# EAGLE board magnetorquer_board_f1 (EAGLE 9.0.0)
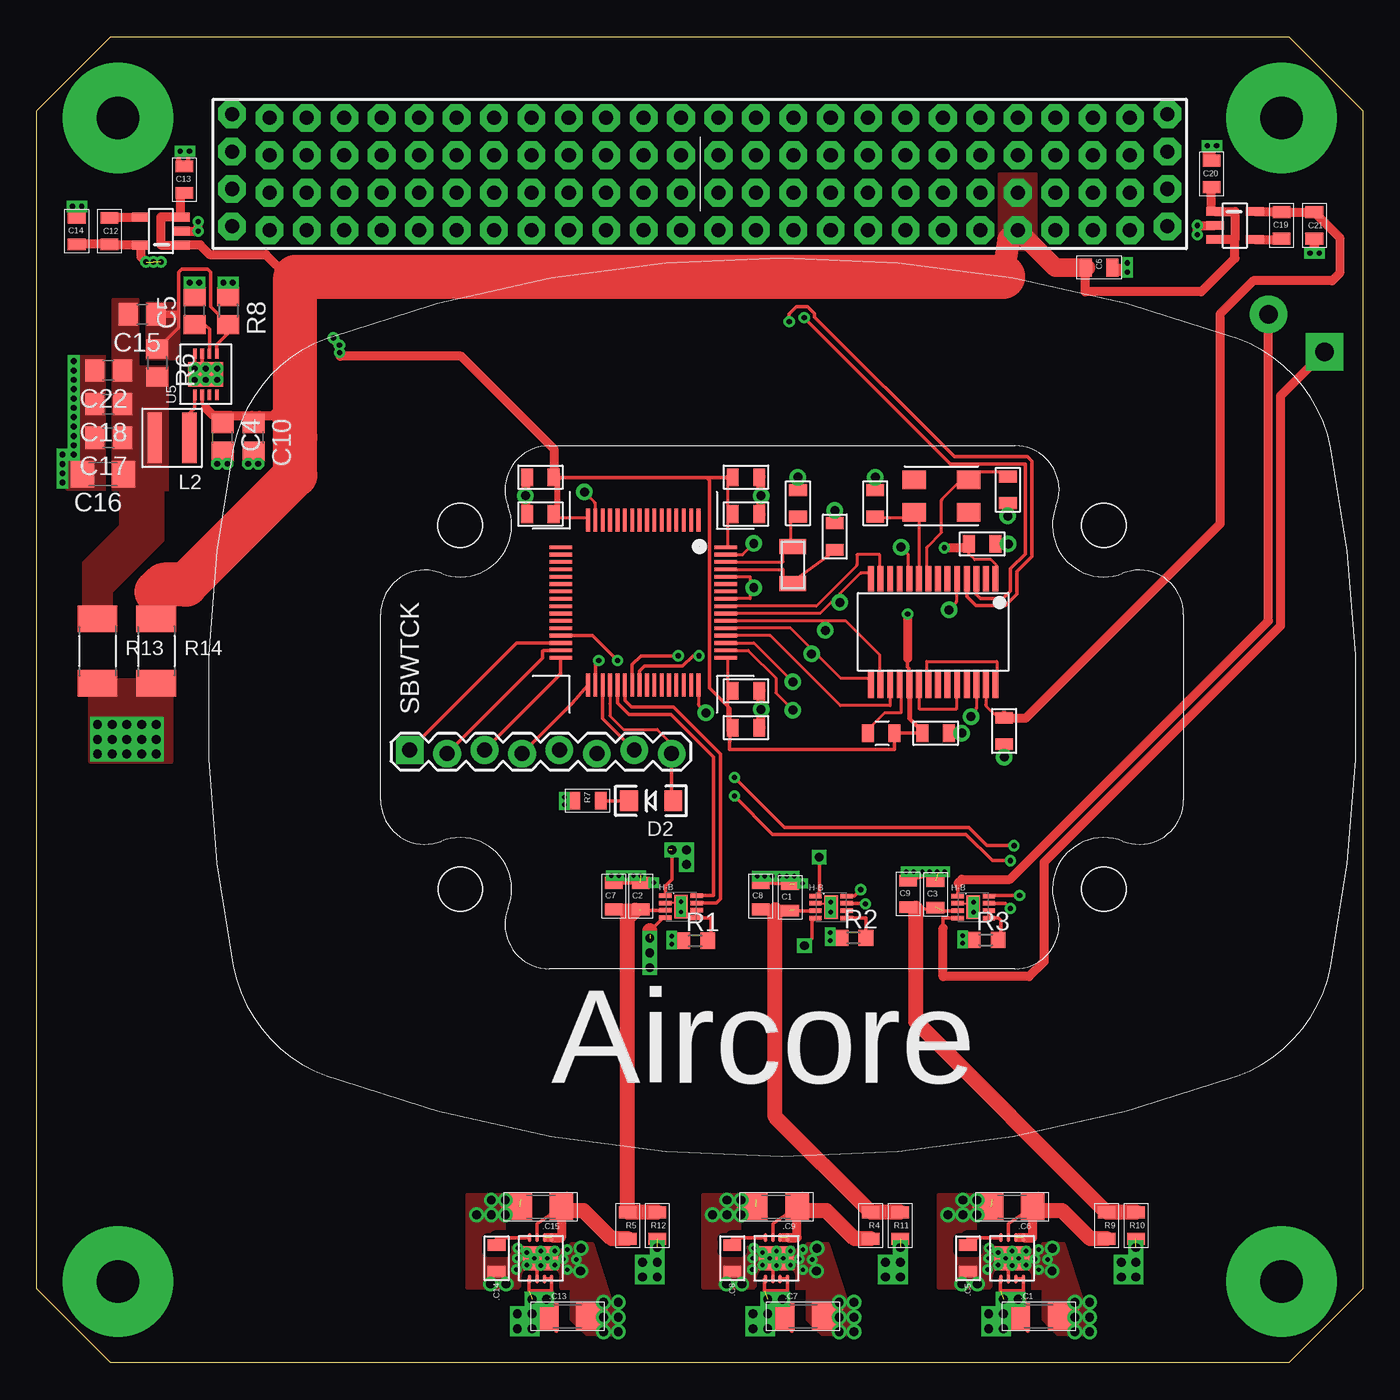
[diagram p0: board, top side]
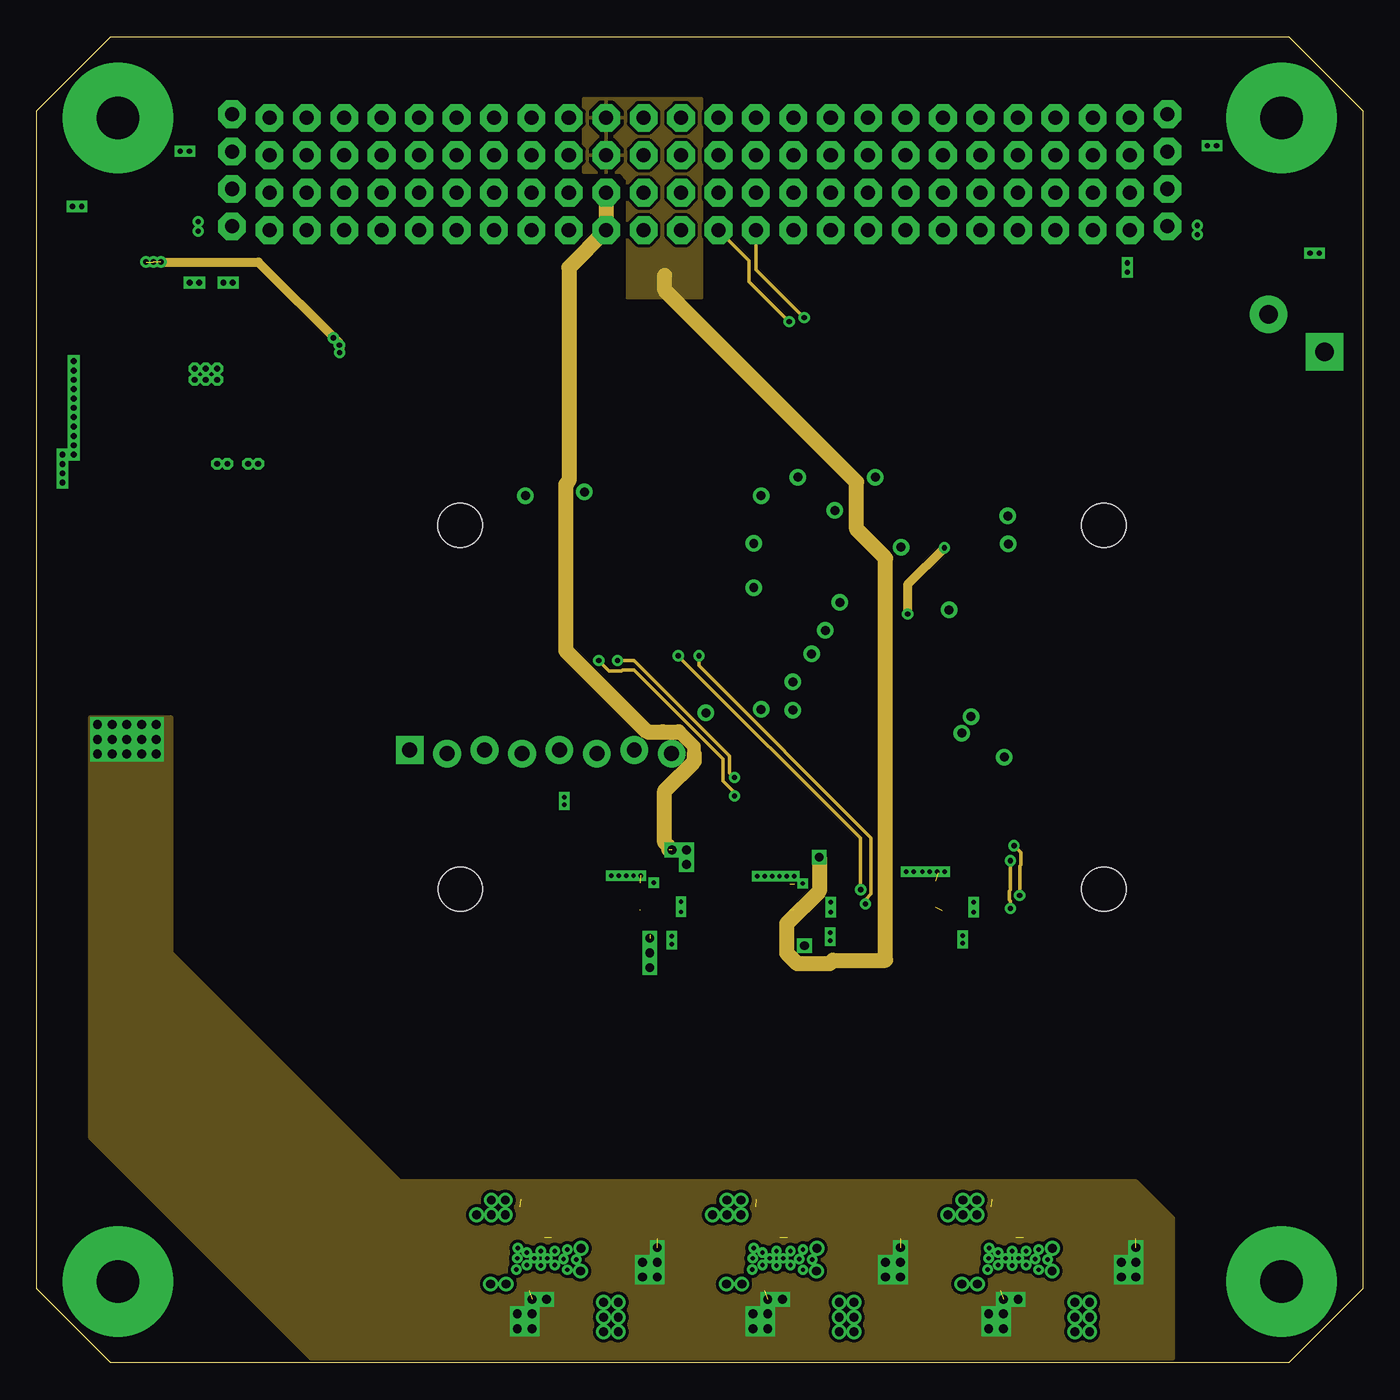
[diagram p1: board, inner layer Route2]
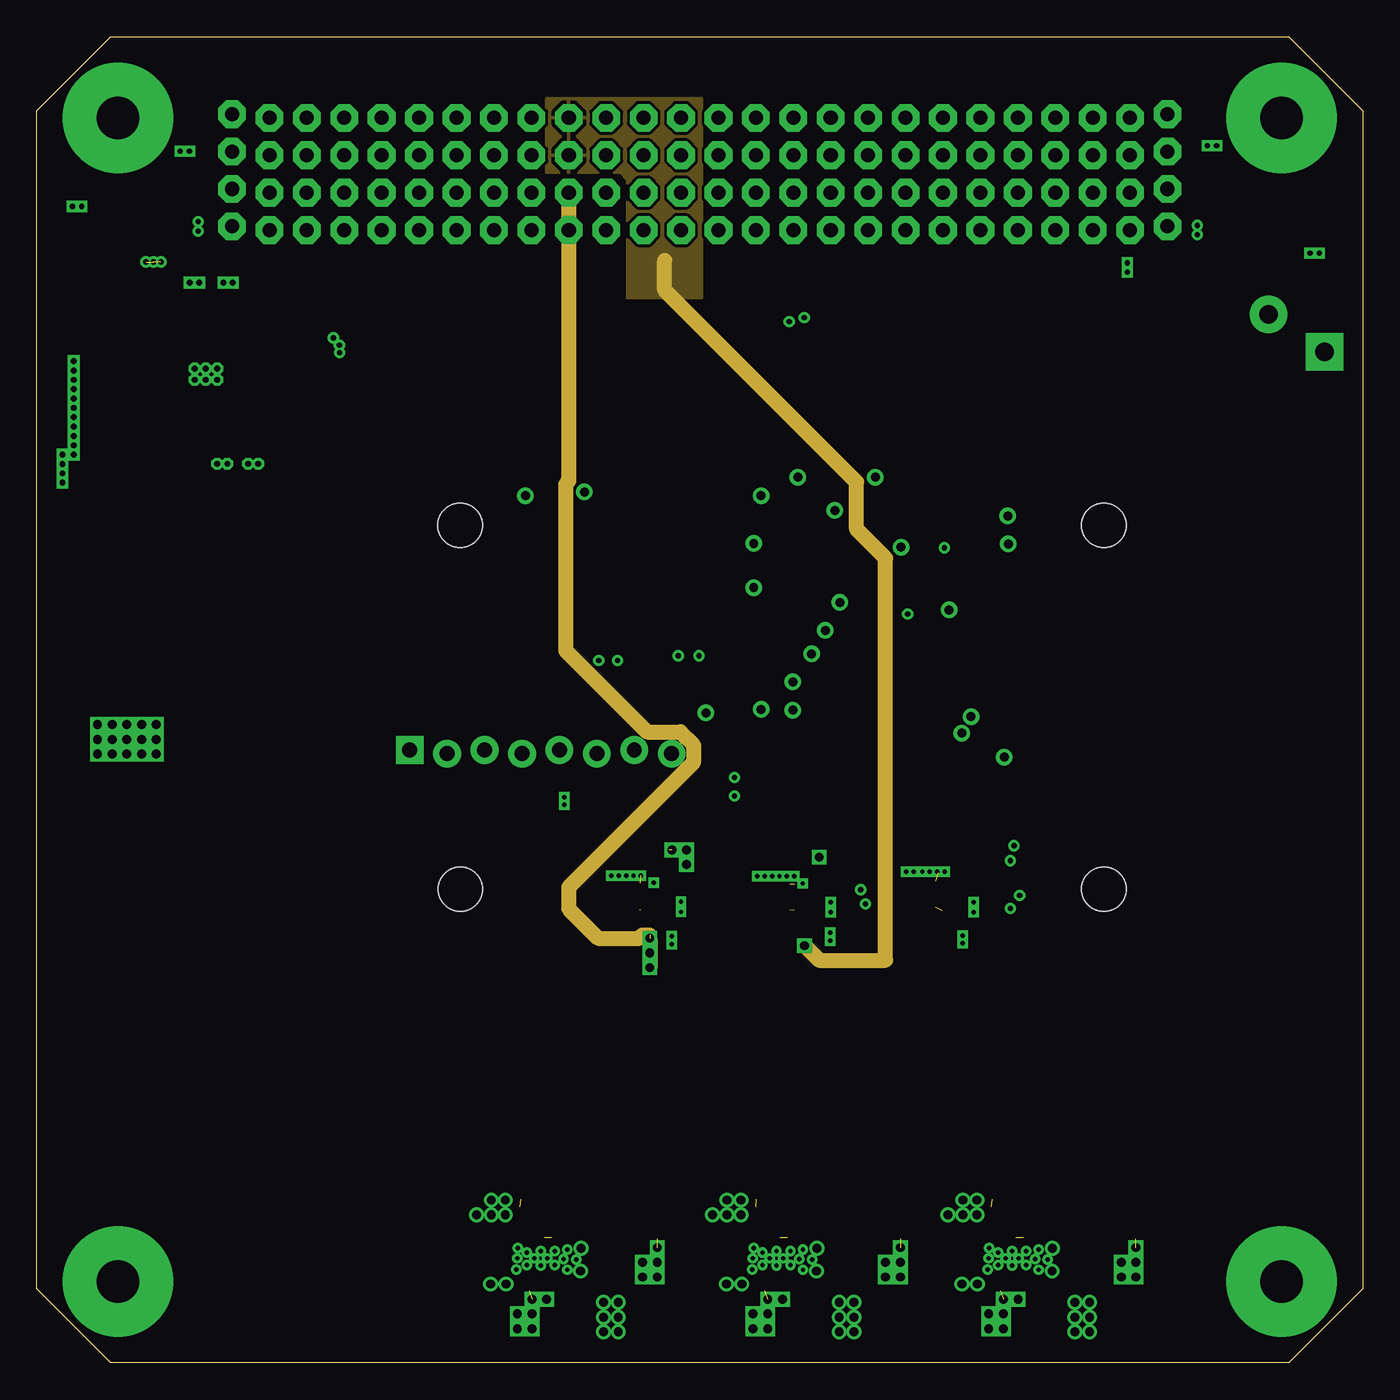
[diagram p2: board, inner layer Route3]
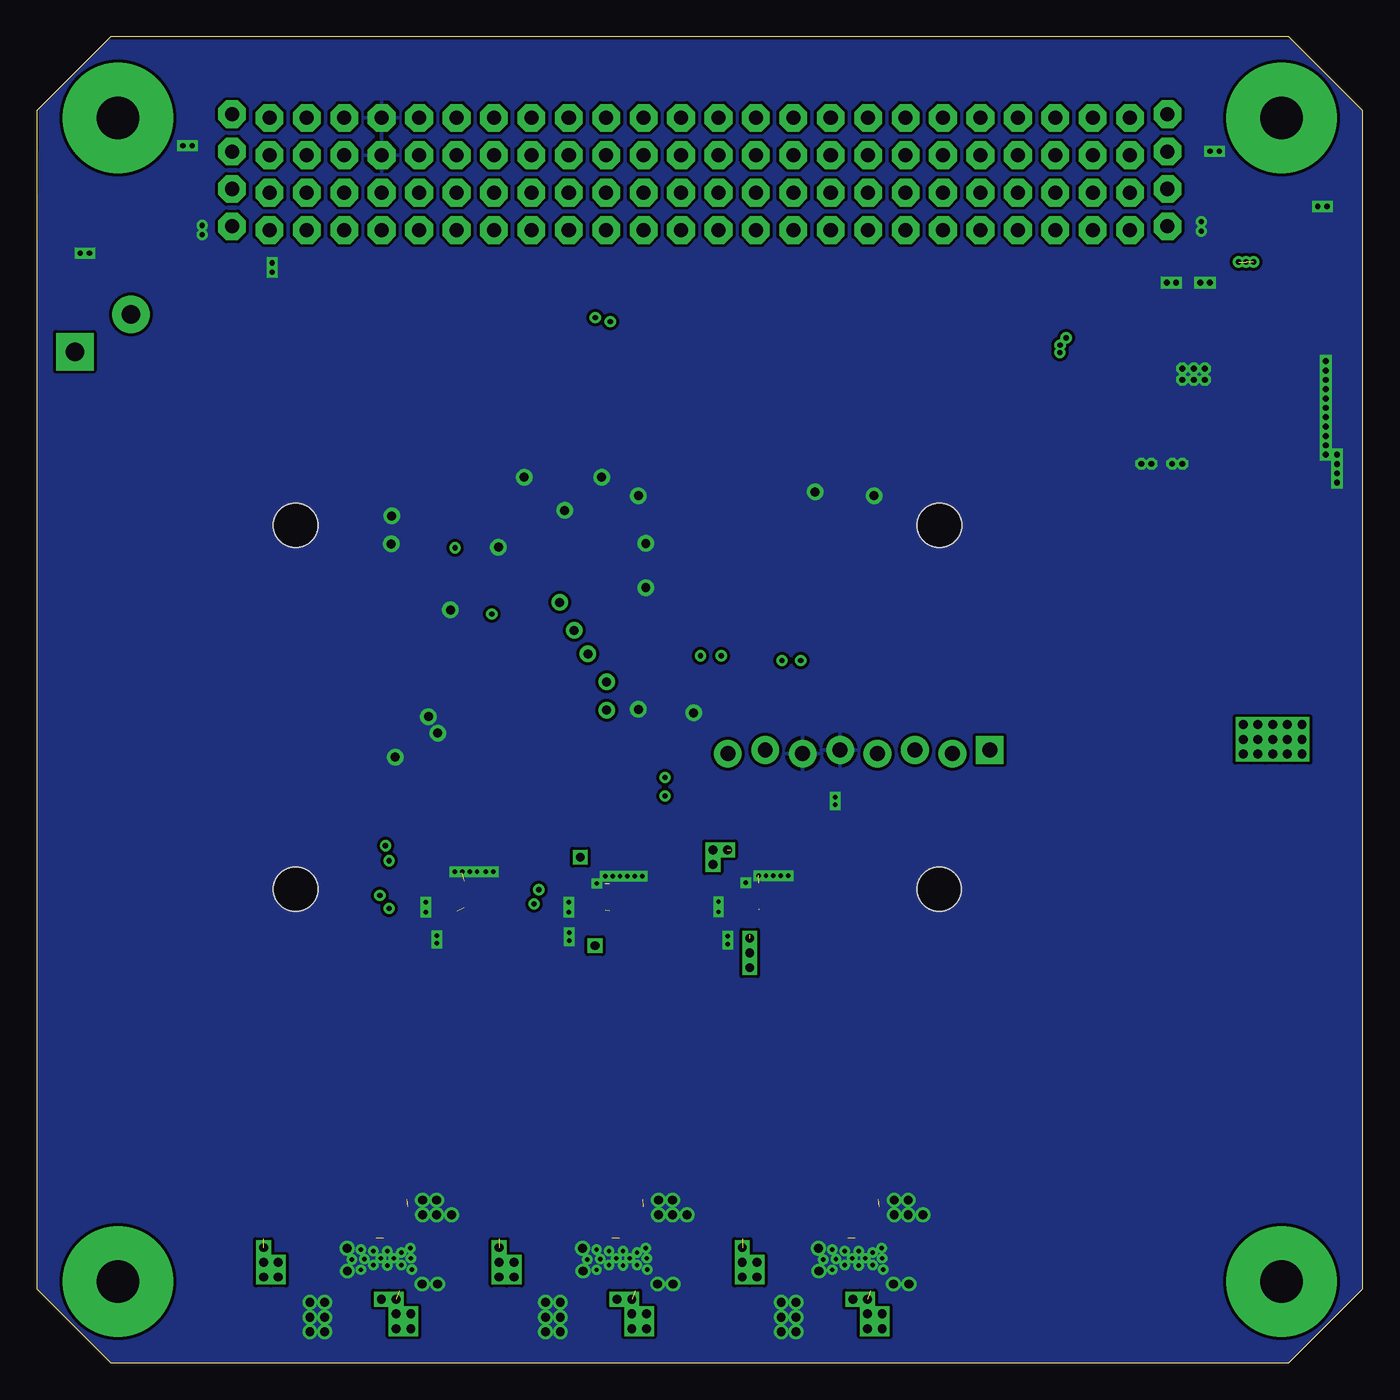
[diagram p3: board, bottom side, seen from below]

Size 90 x 90 mm. Coordinates in mm from the lower left corner, seen from the top.
Copper layers (1*2*3*16): Top 0.035mm / dielectric 1.5mm / Route2 0.035mm / dielectric 0.15mm / Route3 0.035mm / dielectric 0.2mm / Bottom 0.035mm
Design rules "default *": minimum track width 8mil, minimum drill 0.4mm, track to track 8mil, track to pad 8mil, pad to pad 8mil, via to via 8mil, smd to smd 0mil, copper to edge 0.002540625mm, drill to drill 6mil, minimum pad ring 10mil, minimum via ring 8mil, stop-mask expansion 4mil, vias tented up to drill 0mil, thermal gap 10mil

## Footprints (pad centres in the part's own frame; a part is rotated, then mirrored left to right if it is on the bottom)
1206 = smd 1.6 x 1.8: 1 -1.4,0; 2 1.4,0
0805 = smd 0.8 x 1.2: 1 -0.9,0; 2 0.9,0
C0805 = smd 1.3 x 1.5: 1 -0.95,0; 2 0.95,0
C1206 = smd 1.6 x 1.8: 1 -1.4,0; 2 1.4,0
LED-1206 = smd 1.2 x 1.4: A -1.5,0; C 1.5,0
COILCRAFT_XAL4020 = smd 0.98 x 3.4: P$1 -1.185,0; P$2 1.185,0
SOT-23-5 = smd 0.6 x 1.2: P$1 -0.95,-1.35; P$2 0,-1.35; P$3 0.95,-1.35; P$4 0.95,1.35; P$5 -0.95,1.35
R0603 = smd 1 x 1.1: 1 -0.85,0; 2 0.85,0
R0805 = smd 1.3 x 1.5: 1 -0.95,0; 2 0.95,0
R2010 = smd 1.8 x 2.7: 1 -2.2,0; 2 2.2,0
DFN-8EE = smd 0.83 x 0.3: GND@1 -1.065,0.25; IN1 1.065,0.25; IN2 1.065,0.75; OUTA -1.065,-0.75; OUTB -1.065,0.75; VDD -1.065,-0.25; VREF 1.065,-0.25; VSET 1.065,-0.75 | smd 0.9 x 1.6: GND@2 0,0
LTC3624 = smd 0.7 x 0.25: FB 1.4,-0.75; GND@1 1.4,0.75; INTVCC 1.4,-0.25; MODE/SYNC 1.4,0.25; PGOOD -1.4,-0.75; RUN -1.4,-0.25; SW -1.4,0.75; V_IN -1.4,0.25 | smd 1.65 x 2.38: GND@PAD 0,0
PC104_CONNECTOR = drill 0.953 pad 1.88 octagon: P$1 -31.75,32.134; P$2 -31.75,34.674; P$3 -31.75,37.214; P$4 -31.75,39.754; P$5 -29.21,31.88; P$6 -29.21,34.42; P$7 -29.21,36.96; P$8 -29.21,39.5; P$9 -26.67,31.88; P$10 -26.67,34.42; P$11 -26.67,36.96; P$12 -26.67,39.5; P$13 -24.13,31.88; P$14 -24.13,34.42; P$15 -24.13,36.96; P$16 -24.13,39.5; P$17 -21.59,31.88; P$18 -21.59,34.42; P$19 -21.59,36.96; P$20 -21.59,39.5; P$21 -19.05,31.88; P$22 -19.05,34.42; P$23 -19.05,36.96; P$24 -19.05,39.5; P$25 -16.51,31.88; P$26 -16.51,34.42; P$27 -16.51,36.96; P$28 -16.51,39.5; P$29 -13.97,31.88; P$30 -13.97,34.42; P$31 -13.97,36.96; P$32 -13.97,39.5; P$33 -11.43,31.88; P$34 -11.43,34.42; P$35 -11.43,36.96; P$36 -11.43,39.5; P$37 -8.89,31.88; P$38 -8.89,34.42; P$39 -8.89,36.96; P$40 -8.89,39.5; P$41 -6.35,31.88; P$42 -6.35,34.42; P$43 -6.35,36.96; P$44 -6.35,39.5; P$45 -3.81,31.88; P$46 -3.81,34.42; P$47 -3.81,36.96; P$48 -3.81,39.5; P$49 -1.27,31.88; P$50 -1.27,34.42; P$51 -1.27,36.96; P$52 -1.27,39.5; P$53 1.27,31.88; P$54 1.27,34.42; P$55 1.27,36.96; P$56 1.27,39.5; P$57 3.81,31.88; P$58 3.81,34.42; P$59 3.81,36.96; P$60 3.81,39.5; P$61 6.35,31.88; P$62 6.35,34.42; P$63 6.35,36.96; P$64 6.35,39.5; P$65 8.89,31.88; P$66 8.89,34.42; P$67 8.89,36.96; P$68 8.89,39.5; P$69 11.43,31.88; P$70 11.43,34.42; P$71 11.43,36.96; P$72 11.43,39.5; P$73 13.97,31.88; P$74 13.97,34.42; P$75 13.97,36.96; P$76 13.97,39.5; P$77 16.51,31.88; P$78 16.51,34.42; P$79 16.51,36.96; P$80 16.51,39.5; P$81 19.05,31.88; P$82 19.05,34.42; P$83 19.05,36.96; P$84 19.05,39.5; P$85 21.59,31.88; P$86 21.59,34.42; P$87 21.59,36.96; P$88 21.59,39.5; P$89 24.13,31.88; P$90 24.13,34.42; P$91 24.13,36.96; P$92 24.13,39.5; P$93 26.67,31.88; P$94 26.67,34.42; P$95 26.67,36.96; P$96 26.67,39.5; P$97 29.21,31.88; P$98 29.21,34.42; P$99 29.21,36.96; P$100 29.21,39.5; P$101 31.75,32.134; P$102 31.75,34.674; P$103 31.75,37.214; P$104 31.75,39.754
BOARD_TEMPLATE = drill 2.9 pad 7.5: P$1 -39.5,39.5; P$2 -39.5,-39.5; P$3 39.5,-39.5; P$4 39.5,39.5
MT_AIRCORE = drill 1.27 pad 2.54 square: A -36.83,-24.13 | drill 1.27 pad 2.54: B -33.02,-26.67 | hole 3: -21.849,12.352; 21.849,12.344; 21.857,-12.347; -21.849,-12.352
8-LFCSP = smd 0.6 x 0.24: P$1 -1.4,0.75; P$2 -1.4,0.25; P$3 -1.4,-0.25; P$4 -1.4,-0.75; P$5 1.4,-0.75; P$6 1.4,-0.25; P$7 1.4,0.25; P$8 1.4,0.75 | smd 1.6 x 2.44: P$9 0,0
MSP-CAN_BLOCK = smd 1.2 x 0.8: 1 -6,6.08; 2 -6,7.88; 3 -8.5,6.08; 4 -8.5,7.88; 9 -8.5,-6.08; 10 -8.5,-7.88; 11 -6,-6.08; 12 -6,-7.88; 13 8.5,6.08; 14 8.5,7.88; 15 6,6.08; 16 6,7.88; 23 8.875,18.955; 24 8.875,20.755; 25 8.875,17.045; 26 8.875,15.245; 27 -3.975,22.105; 28 -3.975,23.905 | smd 1 x 0.25: 3.3V@CAN1 -3.975,22.025; 3.3V@CAN2 8.875,18.875; 3.3V@MSP1 8.501,5.884; 3.3V@MSP2 -8.533,-5.962; 3.3V_ANALOG@MSP2 -8.482,5.904 | smd 0.8 x 1.2: 5 -5.83,10.5; 6 -7.63,10.5; 7 -3.58,13; 8 -5.38,13; 17 -8.545,24.75; 18 -6.745,24.75; 19 -5.83,15.75; 20 -7.63,15.75; 21 7.83,24.5; 22 9.63,24.5 | smd 0.25 x 1: 5V 7.65,24.5 | smd 1.75 x 0.4: CANH -1.6,21.96; CANL -1.6,22.61; P$65 -1.6,23.91; P$66 -1.6,23.26; P$69 -1.6,21.31; P$70 -1.6,20.66; P$71 -1.6,20.01; P$72 -1.6,19.36; P$73 -1.6,18.71; P$74 -1.6,18.06; P$75 -1.6,17.41; P$76 -1.6,16.76; P$77 -1.6,16.11; P$78 -1.6,15.46; P$79 5.6,15.46; P$80 5.6,16.11; P$81 5.6,16.76; P$82 5.6,17.41; P$83 5.6,18.06; P$84 5.6,18.71; P$85 5.6,19.36; P$86 5.6,20.01; P$87 5.6,20.66; P$88 5.6,21.31; P$89 5.6,21.96; P$90 5.6,22.61; P$91 5.6,23.26; P$92 5.6,23.91 | drill 0.61: GND@1 -3.975,24.775; GND@2 -5.875,24.75; GND@3 -3.75,17.5; GND@4 0.5,20.75; GND@5 -8.5,15.75; GND@7 -8.5,10.5; GND@8 -7.25,8; GND@9 -4,7.5; GND@10 -1,7.5; GND@11 7.75,22.25; GND@12 10.5,24.5; GND@13 8.875,21.625; GND@14 7.25,8; GND@15 7.5,4.25; GND@16 -7.5,-4; GND@17 -7.25,-8; GND@26 -6.25,13; P2.4_SPI-CS2 5.397,10.16; P2.7_SPI-CS3 7.303,10.16; P5.4_SPI-MOSI 3.487,11.434; P5.5_SPI-MISO 1.9,12.354; P5.6_SPI-CLK 0,13.348 | smd 1.55 x 0.25: P1.0_A0 -5.6,3.75; P1.1_A1 -5.6,3.25; P1.2_A2 -5.6,2.75; P1.3_A3 -5.6,-1.75; P1.4_A4 -5.6,-2.25; P1.5_A5 -5.6,-2.75; P1.6_GPIO/PWM 5.6,-0.75; P1.7_GPIO/PWM 5.6,-0.25; P2.1_RXD 5.6,-3.75; P2.2_GPIO/PWM 5.6,-3.25; P3.0_A12 -5.6,2.25; P3.1_A13 -5.6,1.75; P3.2_A14 -5.6,1.25; P3.3_A15 -5.6,0.75; P3.4_GPIO_DEBUG 5.6,-2.75; P3.5_GPIO_DEBUG 5.6,-2.25; P3.6_GPIO/PWM 5.6,-1.75; P3.7_GPIO/PWM 5.6,-1.25; P5.0_I2C-SDA-1 5.6,0.25; P5.1_I2C-SCL-1 5.6,0.75; P7.0_I2C-SDA-2 -5.6,-0.25; P7.1_I2C-SCL-2 -5.6,-0.75; P$8 -5.6,0.25; P$11 -5.6,-1.25; P$15 -5.6,-3.25; P$16 -5.6,-3.75; P$43 5.6,1.25; P$44 5.6,1.75; P$45 5.6,2.25; P$46 5.6,2.75; P$47 5.6,3.25; P$48 5.6,3.75 | smd 0.25 x 1.55: P2.0_TXD 3.75,-5.6; P2.5_GPIO 1.75,-5.6; P2.6_GPIO/PWM 2.25,-5.6; P4.0_GPIO -0.25,-5.6; P4.1_GPIO 0.25,-5.6; P4.2_GPIO 0.75,-5.6; P4.3_GPIO 1.25,-5.6; P7.2_SYNC1 -1.75,-5.6; P7.3_GPIO -1.25,-5.6; P7.4_GPIO -0.75,-5.6; P$17 -3.75,-5.6; P$18 -3.25,-5.6; P$19 -2.75,-5.6; P$49 3.75,5.6; P$50 3.25,5.6; P$51 2.75,5.6; P$52 2.25,5.6; P$53 1.75,5.6; P$54 1.25,5.6; P$55 0.75,5.6; P$56 0.25,5.6; P$57 -0.25,5.6; P$58 -0.75,5.6; P$59 -1.25,5.6; P$60 -1.75,5.6; P$61 -2.25,5.6; P$62 -2.75,5.6; P$63 -3.25,5.6; P$64 -3.75,5.6; PJ.3_SYNC2 -2.25,-5.6; SBWTCK 2.75,-5.6; SBWTDIO 3.25,-5.6 | smd 1 x 1.8: P$93 -3.79,10.16; P$94 -1.29,10.16 | smd 1.25 x 1.6: P$104 -6.13,18.38; P$105 -6.13,22.08; P$106 -8.33,22.08; P$107 -8.33,18.38
1X08_CONNECTOR = drill 1.016 pad 1.88: 2 2.54,-0.127; 3 5.08,0.127; 4 7.62,-0.127; 5 10.16,0.127; 6 12.7,-0.127; 7 15.24,0.127; 8 17.78,-0.127 | drill 1.016 pad 1.88 square: SBWTCK 0,0.127

## Placement (x,y rotation side)
.C1  4.7u  [1206]  68.02,3.14 0 top
.C5  10n  [0805]  63.21,7.08 270 top
.C6  4.7u  [1206]  66.21,10.58 180 top
.C7  4.7u  [1206]  52.02,3.14 0 top
.C8  10n  [0805]  47.21,7.08 270 top
.C9  4.7u  [1206]  50.21,10.58 180 top
.C13  4.7u  [1206]  36.02,3.14 0 top
.C14  10n  [0805]  31.21,7.08 270 top
.C15  4.7u  [1206]  34.21,10.58 180 top
C1  1uF  [0805]  51.13,31.59 270 top
C2  1uF  [0805]  40.99,31.66 270 top
C3  1uF  [0805]  61,31.79 270 top
C4  1µF  [C0805]  12.61,62.81 270 top
C5  2.2μF  [C0805]  10.71,71.42 90 top
C6  10 uF  [0805]  72.11,74.34 180 top
C7  10uF  [0805]  39.16,31.67 270 top
C8  10uF  [0805]  49.15,31.67 270 top
C9  10uF  [0805]  59.15,31.82 270 top
C10  10µF  [C0805]  14.71,62.81 270 top
C12  0.01 uF  [0805]  4.93,76.81 90 top
C13  1 uF  [0805]  10.01,80.31 270 top
C14  4.7 uF  [0805]  2.71,76.81 270 top
C15  22pF  [C0805]  7.15,71.16 180 top
C16  0.1µF  [C1206]  4.49,60.32 180 top
C17  1µF  [C0805]  4.87,62.78 180 top
C18  10µF  [C0805]  4.87,65.07 180 top
C19  0.01 uF  [0805]  84.5,77.19 270 top
C20  1 uF  [0805]  79.73,80.69 270 top
C21  4.7 uF  [0805]  86.72,77.19 90 top
C22  47µF  [C0805]  4.87,67.35 180 top
D2  [LED-1206]  41.7,38.14 180 top
L2  COILCRAFT_XAL4020-222ME  [COILCRAFT_XAL4020]  9.19,62.78 180 top
LDO_3V1  TPS732XX  [SOT-23-5]  8.42,76.81 90 top
LDO_5V1  TPS732XX  [SOT-23-5]  81.32,77.19 270 top
R1  1K  [R0603]  44.69,28.64 0 top
R2  1K  [R0603]  55.43,28.84 0 top
R3  1K  [R0603]  64.41,28.69 0 top
R4  DNP  [0805]  56.61,9.31 90 top
R5  DNP  [0805]  40.11,9.31 90 top
R6  450kΩ  [R0805]  8.17,67.86 270 top
R7  330  [0805]  37.38,38.14 180 top
R8  100kΩ  [R0805]  13,71.42 270 top
R9  DNP  [0805]  72.61,9.31 90 top
R10  0  [0805]  74.61,9.31 90 top
R11  0  [0805]  58.61,9.31 90 top
R12  0  [0805]  42.11,9.31 90 top
R13  0  [R2010]  4.11,48.31 270 top
R14  DNP  [R2010]  8.11,48.31 270 top
U1  [DFN-8EE]  43.73,30.95 0 top
U2  [DFN-8EE]  53.92,30.93 0 top
U3  [DFN-8EE]  63.57,30.93 0 top
U5  LTC3624  [LTC3624]  11.47,67.1 90 top
U$1  PC104_CONNECTOR  [PC104_CONNECTOR]  45,45 0 top
U$2  BOARD_TEMPLATE1  [BOARD_TEMPLATE]  45,45 0 top
U$3  MT_AIRCORE  [MT_AIRCORE]  50.59,44.49 180 top
U$4  ANALOG_LDO_ADM7172  [8-LFCSP]  66.21,7.08 270 top
U$5  ANALOG_LDO_ADM7172  [8-LFCSP]  50.21,7.08 270 top
U$7  MSP-CAN_BLOCK  [MSP-CAN_BLOCK]  41.16,51.6 270 top
U$8  PROGRAM/DEBUG_PORT  [1X08_CONNECTOR]  25.32,41.47 0 top
U$9  ANALOG_LDO_ADM7172  [8-LFCSP]  34.21,7.08 270 top

## Library data of the parts
.C1 .C5-.C9 .C13-.C15 = SparkFun-Capacitors
C1-C3 C6-C9 C12-C14 C19-C21 D2 L2 LDO_3V1 LDO_5V1 R4 R5 R7 R9-R14 U1-U3 U5 U$1-U$3 U$7 U$8 = DubSat1 Components
C4 C5 C10 C15-C18 C22 = rcl; SPICEPREFIX: C
R1-R3 R6 R8 = rcl; SPICEPREFIX: R
U$4 U$5 U$9 = ICs

## Nets
3V3_BUCK_ENABLE: U5.RUN
3V3_BUCK_FB1: C15.1 R6.1 R8.2 U5.FB
3V3_BUCK_INTVCC1: C5.1 U5.INTVCC
3V3_BUCK_PGOOD: U5.PGOOD
3V3_BUCK_SW1: L2.P$1 U5.SW
+3V3: C12.1 C14.2 LDO_3V1.P$5 U$7.3.3V@CAN1 U$7.3.3V@CAN2 U$7.3.3V@MSP1 U$7.3.3V@MSP2 U$7.3.3V_ANALOG@MSP2
+5V: C19.1 C21.2 LDO_5V1.P$5 U$7.5V
CANH: U$1.P$53 U$7.CANH
CANL: U$1.P$57 U$7.CANL
GND: .C1.2 .C5.2 .C6.2 .C7.2 .C8.2 .C9.2 .C13.2 .C14.2 .C15.2 C1.1 C2.1 C3.1 C4.2 C5.2 C6.1 C7.1 C8.1 C9.1 C10.2 C13.1 C14.1 C16.2 C17.2 C18.2 C20.1 C21.1 C22.2 LDO_3V1.P$2 LDO_5V1.P$2 R1.1 R2.1 R3.1 R7.2 R8.1 U1.GND@1 U1.GND@2 U2.GND@1 U2.GND@2 U3.GND@1 U3.GND@2 U5.GND@1 U5.GND@PAD U5.MODE/SYNC U$1.P$87 U$1.P$88 U$4.P$6 U$4.P$9 U$5.P$6 U$5.P$9 U$7.GND@1 U$7.GND@2 U$7.GND@3 U$7.GND@4 U$7.GND@5 U$7.GND@7 U$7.GND@8 U$7.GND@9 U$7.GND@10 U$7.GND@11 U$7.GND@12 U$7.GND@13 U$7.GND@14 U$7.GND@15 U$7.GND@16 U$7.GND@17 U$7.GND@26 U$8.5 U$8.6 U$9.P$6 U$9.P$9
MT_X_A: U2.OUTA U$1.P$39 U$1.P$40
MT_X_B: U2.OUTB U$1.P$43 U$1.P$44
MT_Y_A: U1.OUTA U$1.P$37 U$1.P$38
MT_Y_B: U1.OUTB U$1.P$41 U$1.P$42
MT_Z_A: U3.OUTA U$3.A
MT_Z_B: U3.OUTB U$3.B
N$1: R1.2 U1.VREF U1.VSET
N$2: R2.2 U2.VREF U2.VSET
N$3: D2.C R7.1
N$4: C12.2 LDO_3V1.P$4
N$7: R3.2 U3.VREF U3.VSET
N$8: C19.2 LDO_5V1.P$4
N$9: .C5.1 U$4.P$4
N$11: .C8.1 U$5.P$4
N$15: .C14.1 U$9.P$4
N$27: U$7.SBWTCK U$8.SBWTCK
N$28: U$7.SBWTDIO U$8.2
N$29: U$7.P2.0_TXD U$8.3
N$30: U$7.P2.1_RXD U$8.4
N$31: U$7.P3.4_GPIO_DEBUG U$8.7
N$32: D2.A U$7.P3.5_GPIO_DEBUG U$8.8
PWM_X_1: U2.IN1 U$7.P1.7_GPIO/PWM
PWM_X_2: U2.IN2 U$7.P1.6_GPIO/PWM
PWM_Y_1: U1.IN1 U$7.P3.7_GPIO/PWM
PWM_Y_2: U1.IN2 U$7.P3.6_GPIO/PWM
PWM_Z_1: U3.IN1 U$7.P2.2_GPIO/PWM
PWM_Z_2: U3.IN2 U$7.P2.6_GPIO/PWM
V_TORQ-X: C1.2 C8.2 R4.2 R11.2 U2.VDD
V_TORQ-Y: C2.2 C7.2 R5.2 R12.2 U1.VDD
V_TORQ-Z: C3.2 C9.2 R9.2 R10.2 U3.VDD
VBAT: C4.1 C6.2 C10.1 C13.2 C20.2 LDO_3V1.P$1 LDO_3V1.P$3 LDO_5V1.P$1 LDO_5V1.P$3 R14.1 U5.V_IN U$1.P$85 U$1.P$86
VBUCK: C15.2 C16.1 C17.1 C18.1 C22.1 L2.P$2 R6.2 R13.1
VBUCK/VBAT: .C1.1 .C7.1 .C13.1 R10.1 R11.1 R12.1 R13.2 R14.2 U$4.P$5 U$4.P$7 U$4.P$8 U$5.P$5 U$5.P$7 U$5.P$8 U$9.P$5 U$9.P$7 U$9.P$8
VOUT-X: .C9.1 R4.1 U$5.P$1 U$5.P$2 U$5.P$3
VOUT-Y: .C15.1 R5.1 U$9.P$1 U$9.P$2 U$9.P$3
VOUT-Z: .C6.1 R9.1 U$4.P$1 U$4.P$2 U$4.P$3

## Tracks (layer width: path | path; a pad name or v marks a point on that pad's centre or on a via)
3V3_BUCK_FB1
  Top 0.254: R6.1 9.63,70.27 9.63,71.03 | 9.63,71.03 9.63,74.04 9.82,74.23 11.6,74.23 11.79,74.04 11.79,71.67 R8.2 13,69.89 12.22,69.12 U5.FB | 9.63,71.03 9.5,71.16
  Top 0.508: 9.5,71.16 C15.1
  pour Top (no thermals): 7.41,71.92 7.41,68.11 9.69,68.11 9.69,71.92
3V3_BUCK_INTVCC1
  Top 0.254: U5.INTVCC 11.72,70.15 11.47,70.4 10.78,70.4 C5.1
3V3_BUCK_SW1
  Top 0.254: U5.SW 10.72,64.81 10.71,64.81 10.37,64.47 L2.P$1
+3V3  (via drill 0.35)  (2 unrouted)
  Top 0.254: 35.25,60.09 U$7.3.3V@MSP2 | 45.45,60.09 U$7.3.3V_ANALOG@MSP2 | 45.45,60.09 35.25,60.09 | 35.28,58.14 35.25,58.18 35.25,59.99 35.25,60.09 | 45.45,60.09 45.66,59.87 45.66,45.79 47.05,44.4 U$7.3.3V@MSP1 47.05,42.19 47.03,42.17 47.03,41.63 58.21,41.63 58.21,42.52 58.14,42.59 58.29,42.73 U$7.3.3V@CAN2 60.04,42.88 59.21,43.71 59.21,47.11 59.11,47.21 59.11,47.81
  Top 0.61: C14.2 C12.1 4.98,75.86 LDO_3V1.P$5 7.07,75.05 v7.41,74.72 | 35.25,59.99 35.09,60.14 35.09,62.02 28.8,68.31 20.61,68.31 v20.55,68.56 20.54,68.57 v20.54,69.06 20.13,69.47 v20.13,69.56 | U$7.3.3V@CAN1 62.92,55.31 v61.61,55.31 | v59.11,50.81 59.11,47.81
  Route2 0.61: v7.41,74.72 15.03,74.72 20.55,69.2 | 20.55,69.2 v20.55,68.56 | v20.13,69.56 20.5,69.2 20.55,69.2 | v61.61,55.31 59.11,52.81 v59.11,50.81
  other vias: 7.92,74.72 8.42,74.72
+5V
  Top 0.61: C21.2 C19.1 84.45,78.14 LDO_5V1.P$5 | 86.72,78.15 C21.2 | C21.2 88.43,76.38 88.43,73.96 87.93,73.45 82.59,73.45 80.31,71.16 80.31,56.94 67.1,43.73 65.66,43.73 U$7.5V
CANH  (via drill 0.35)
  Top 0.254: U$7.CANH 63.13,52.02 63.74,51.4 65.76,51.4 66.54,52.18 66.54,53.7 67.56,54.72 67.56,61.19 67.24,61.51 62.27,61.51 52.8,70.99 52.8,71.22 52.33,71.69 51.58,71.69 51.07,71.19 v51.07,70.68
  Route2 0.254: U$1.P$53 48.35,74.8 48.35,73.4 v51.07,70.68
CANL  (via drill 0.35)
  Top 0.254: 63.86,53.29 U$7.CANL 63.77,52.13 64.05,51.86 65.57,51.86 66.08,52.37 66.08,53.89 67.1,54.91 67.1,61 62.02,61 v52.09,70.93
  Route2 0.254: U$1.P$57 48.81,74.21 v52.09,70.93
GND  (via drill 0.3, 0.35, 0.4, 0.6)  (6 unrouted)
  Top 0.152: U1.GND@1 43.64,31.2 v43.73,31.3 U1.GND@2 v43.73,30.6 | U2.GND@1 53.8,31.18 v53.89,31.27 | U3.GND@1 63.5,31.18 63.53,31.21 | v63.59,31.27 63.53,31.21 | v53.89,30.57 53.89,30.9 U2.GND@2 | 63.59,31.03 63.59,31.14 63.53,31.21 | U3.GND@2 63.57,30.86 63.59,30.84
  Top 0.254: 50.12,32.53 51.43,32.48 | v51.98,32.53 51.43,32.48 | 51.43,32.48 C8.1 | v60.61,33.34 61.18,33.25 | 61.3,33.37 61.18,33.25 | 61.18,33.25 C9.1 | v41.87,32.57 C7.1 v41,33.07 | v43.09,28.95 43.53,28.95 R1.1 43.62,28.41 v43.09,28.41 | 54.23,28.83 R2.1 | v62.86,29 63.16,28.69 | 63.16,28.69 R3.1 | v62.86,28.46 63.09,28.69 63.16,28.69 | 63.59,31.03 v63.59,31.27 63.57,31.25 U3.GND@2 63.57,31 63.59,31.03 | 63.59,31.03 63.59,30.84 v63.59,30.57 | v35.81,38.39 36.23,38.39 R7.2 36.22,37.88 v35.81,37.88 | v53.87,28.64 54.06,28.83 54.23,28.83 | v53.87,29.2 54.23,28.83 | U5.GND@1 10.72,67.85 U5.GND@PAD | U5.MODE/SYNC 11.22,67.35 U5.GND@PAD | U5.GND@PAD v11.47,66.72 | v11.02,73.32 10.71,73.02 C5.2 10.38,72.7 v10.38,73.32 | R8.1 13.3,72.67 v13.3,73.32 v12.67,73.32 | U$4.P$6 65.96,6.43 66.21,6.43 U$4.P$9 | U$5.P$6 49.96,6.43 50.21,6.43 U$5.P$9 | U$9.P$6 33.96,6.43 34.21,6.43 U$9.P$9
  Top 0.305: v3.05,78.49 2.93,77.98 2.87,77.92 | 2.87,77.92 C14.1 | v2.42,78.49 2.87,78.17 2.87,77.92 | v10.36,82.24 10.23,81.47 C13.1 9.6,81.67 v9.72,82.24
  Top 0.508: v74.02,74.02 73.38,74.02 C6.1 73.7,74.34 v74.02,74.66
  Top 0.61: LDO_3V1.P$2 v10.96,76.81 v10.96,77.45 | LDO_5V1.P$2 v78.78,77.19 v78.78,76.56 | v86.43,75.32 86.72,75.61 C21.1 86.72,75.66 v87.06,75.32 | v79.44,82.62 79.44,81.93 C20.1 79.74,82.27 v80.08,82.62 | .C1.2 70.42,2.14 v70.47,4.09 | 64.86,11.08 63.79,11 v63.81,10.03 | .C7.2 54.42,2.14 v54.47,4.09 | 48.86,11.08 47.79,11 v47.81,10.03 | .C13.2 38.42,2.14 v38.47,4.09 | 32.86,11.08 31.79,11 v31.81,10.03 | v12.23,61.02 12.23,61.48 C4.2 12.61,61.34 v12.93,61.02 | v14.33,61.02 14.33,61.48 14.64,61.79 | 14.64,61.79 C10.2 | v15.03,61.02 14.64,61.41 14.64,61.79
  other vias: 10.71,66.72 10.71,67.48 12.23,66.72 11.47,67.48 12.23,67.48 1.74,59.73 1.74,60.37 1.74,61 2.51,61.64 2.51,62.27 2.51,62.91 2.51,63.54 2.51,64.18 2.51,64.81 2.51,65.45 2.51,66.08 2.51,66.72 2.51,67.35 2.51,67.99 1.74,61.64 70.47,2.09 63.81,11.03 62.81,5.33 63.86,5.33 65.26,6.63 66.21,6.58 67.16,6.63 67.16,7.58 66.21,7.58 65.26,7.48 65.76,7.08 66.66,7.08 64.66,7.78 64.61,7.08 64.56,6.33 68.01,6.3 67.76,7.03 68.01,7.68 68.92,6.22 68.95,7.75 68.63,7.01 70.47,3.09 71.47,2.09 71.47,3.09 71.47,4.09 62.86,11.03 62.86,10.03 61.86,10.03 54.47,2.09 47.81,11.03 46.81,5.33 47.86,5.33 49.26,6.63 50.21,6.58 51.16,6.63 51.16,7.58 50.21,7.58 49.26,7.48 49.76,7.08 50.66,7.08 48.66,7.78 48.61,7.08 48.56,6.33 52.01,6.3 51.76,7.03 52.01,7.68 52.92,6.22 52.95,7.75 52.63,7.01 54.47,3.09 55.47,2.09 55.47,3.09 55.47,4.09 46.86,11.03 46.86,10.03 45.86,10.03 38.47,2.09 31.81,11.03 30.81,5.33 31.86,5.33 33.26,6.63 34.21,6.58 35.16,6.63 35.16,7.58 34.21,7.58 33.26,7.48 33.76,7.08 34.66,7.08 32.66,7.78 32.61,7.08 32.56,6.33 36.01,6.3 35.76,7.03 36.01,7.68 36.92,6.22 36.95,7.75 36.63,7.01 38.47,3.09 39.47,2.09 39.47,3.09 39.47,4.09 30.86,11.03 30.86,10.03 29.86,10.03 59.51,33.34 59.01,33.34 61.11,33.34 61.61,33.34 60.11,33.34 51.41,33.04 50.91,33.04 50.41,33.04 49.91,33.04 49.41,33.04 48.91,33.04 40.5,33.07 40,33.07 39.5,33.07 39,33.07
  pour Bottom: -0.21,89.7 89.7,89.7 90.7,0.3 89.2,-0.21 -0.21,-0.21
  pour Top (no thermals): 2.84,68.37 4.61,68.37 4.61,59.22 2.07,59.22 2.07,61.26 2.84,61.26
  pour Top (isolate 0.4, no thermals): 61.21,5.08 61.21,11.41 63.71,11.41 63.71,7.08 64.21,7.08 64.21,8.08 69.71,8.08 71.71,1.91 69.31,1.91 68.31,2.91 68.31,5.01
  pour Top (isolate 0.4, no thermals): 45.21,5.08 45.21,11.41 47.71,11.41 47.71,7.08 48.21,7.08 48.21,8.08 53.71,8.08 55.71,1.91 53.31,1.91 52.31,2.91 52.31,5.01
  pour Top (isolate 0.4, no thermals): 29.21,5.08 29.21,11.41 31.71,11.41 31.71,7.08 32.21,7.08 32.21,8.08 37.71,8.08 39.71,1.91 37.31,1.91 36.31,2.91 36.31,5.01
MT_X_A  (via drill 0.6)
  Top 0.254: U2.OUTA 52.61,29.94 52.61,28.81 v52.11,28.31
  Route3 1.016: v52.11,28.31 53.11,27.31 57.61,27.31 57.61,54.61 55.65,56.58 55.65,59.78 43.86,71.56 | 43.86,71.56 42.61,72.81 42.61,74.81 | 43.86,71.56
  pour Route3: 34.61,85.81 34.61,80.81 39.61,80.81 40.11,80.31 40.11,72.31 45.11,72.31 45.11,85.81
MT_X_B  (via drill 0.6)
  Top 0.254: U2.OUTB 53.11,31.94 v53.11,34.31
  Route2 1.016: v53.11,34.31 53.11,32 50.9,29.79 50.9,27.81 51.61,27.1 53.82,27.1 54.04,27.31 57.61,27.31 57.61,54.61 55.65,56.58 55.65,59.78 42.61,72.81 42.61,73.81
  pour Route2: 37.11,85.81 37.11,80.81 39.61,80.81 40.11,80.31 40.11,72.31 45.11,72.31 45.11,85.81
MT_Y_A  (via drill 0.6)  (1 unrouted)
  Top 0.254: U1.OUTA 42.5,30.2 41.61,29.31
  Top 1.016: v41.61,27.81 v41.61,28.81 41.61,29.31
  Route3 1.016: U$1.P$38 U$1.P$37 36.11,59.84 35.9,59.63 35.9,48.34 41.42,42.82 43.71,42.82 44.57,41.95 44.57,40.73 36.11,32.27 36.11,30.81 38.11,28.81 40.9,28.81 41.11,29.03 41.61,29.03 | v41.61,28.81 v41.61,26.81
MT_Y_B  (via drill 0.6)  (1 unrouted)
  Top 0.254: U1.OUTB 42.66,32.36 43.11,32.81 v43.11,34.81
  Route2 0.9: 43.57,42.82 43.62,42.76 43.68,42.76 44.61,41.83 44.61,41.31
  Route2 1.016: U$1.P$42 U$1.P$41 36.11,74.34 36.11,59.85 35.9,59.63 35.9,48.34 41.42,42.81 42.48,42.81 42.48,42.82 43.57,42.82 | 42.9,34.81 42.9,35.03 42.61,35.31 42.61,38.81 43.67,39.87 43.71,39.87 44.57,40.73 44.57,40.77 44.61,40.81 44.61,41.31 | v43.11,34.81 v44.11,34.81 v44.11,33.81
MT_Z_A
  Top 0.254: 62.6,30.18 U3.OUTA 61.51,30.18 61.51,29.51
  Top 0.61: U$3.A 84.42,65.62 84.42,50.01 68.37,33.96 68.37,27.22 67.35,26.2 61.51,26.2 61.51,29.51
MT_Z_B
  Top 0.254: U3.OUTB 62.53,31.68 62.53,32.55
  Top 0.61: 62.53,32.55 62.78,32.81 66.06,32.81 83.61,50.35 U$3.B
N$1
  Top 0.254: U1.VREF U1.VSET 45.76,30.2 45.76,28.86 R1.2
N$2
  Top 0.254: U2.VREF U2.VSET 56.27,30.18 56.28,30.16 R2.2
N$3
  Top 0.254: D2.C R7.1
N$4
  Top 0.61: C12.2 4.98,77.76 LDO_3V1.P$4
N$7
  Top 0.254: U3.VREF U3.VSET | U3.VSET 64.62,30.17 | U3.VSET 65.28,30.18 65.45,30.01 65.45,29.19 65.26,29 R3.2
N$8
  Top 0.61: LDO_5V1.P$4 84.45,76.25 C19.2
N$9
  Top 0.254: U$4.P$4 63.21,8.48 .C5.1
N$10
  Top 0.61: 67.26,8.48 66.66,8.48
N$11
  Top 0.254: U$5.P$4 47.21,8.48 .C8.1
N$12
  Top 0.61: 51.26,8.48 50.66,8.48
N$15
  Top 0.254: U$9.P$4 31.21,8.48 .C14.1
N$16
  Top 0.61: 35.26,8.48 34.66,8.48
N$27
  Top 0.254: U$7.SBWTCK 32.57,48.85 U$8.SBWTCK
N$28
  Top 0.254: U$7.SBWTDIO 34.38,48.35 34.33,48.3 34.33,47.82 U$8.2
N$29
  Top 0.254: U$8.3 35.24,46.44 | 35.24,46.44 35.38,46.58 | 35.24,46.44 35.57,46.77 U$7.P2.0_TXD
N$30
  Top 0.254: U$8.4 36.33,44.73 U$7.P2.1_RXD
N$31
  Top 0.254: U$8.7 38.41,43.74 U$7.P3.4_GPIO_DEBUG
N$32
  Top 0.203: U$7.P3.5_GPIO_DEBUG 38.9,44.72 38.9,43.91 39.82,42.99 42.1,42.99 43.09,42 U$8.8
  Top 0.254: U$8.8 43.09,38.24 D2.A
PWM_X_1  (via drill 0.35)
  Top 0.254: U2.IN1 56.21,31.18 v56.24,31.15 | v44.95,47.98 44.54,47.98 43.83,47.28 41.24,47.28 40.91,46.95 U$7.P1.7_GPIO/PWM
  Route2 0.254: v56.24,31.15 56.24,31.42 56.63,31.82 56.63,35.63 44.95,47.31 v44.95,47.98
PWM_X_2  (via drill 0.35)
  Top 0.254: U2.IN2 55.49,31.68 v55.92,32.11 | v43.54,47.98 41,47.98 40.41,47.4 U$7.P1.6_GPIO/PWM
  Route2 0.254: v55.92,32.11 55.92,35.6 v43.54,47.98
PWM_Y_1
  Top 0.254: U1.IN1 46.13,31.2 46.4,31.47 46.4,41.32 43.22,44.49 40.36,44.49 39.91,44.94 U$7.P3.7_GPIO/PWM
PWM_Y_2
  Top 0.254: U1.IN2 45.94,31.7 45.94,41.13 43.06,44.01 40.2,44.01 39.41,44.79 U$7.P3.6_GPIO/PWM
PWM_Z_1  (via drill 0.35)
  Top 0.254: U3.IN1 65.74,31.18 v66.08,30.84 | v38.14,47.67 37.91,47.44 U$7.P2.2_GPIO/PWM | v66.08,34.08 64.87,34.08 63.08,35.87 49.94,35.87 v47.35,38.46
  Route2 0.254: v66.08,30.84 66.08,31.35 66.01,31.42 66.01,32.01 66.08,32.08 v66.08,34.08 | v47.35,38.46 47.35,38.72 46.58,39.49 46.58,40.99 40.54,47.03 39.77,47.03 39.71,46.96 38.85,46.96 v38.14,47.67
PWM_Z_2  (via drill 0.35)
  Top 0.254: U3.IN2 64.67,31.72 v66.72,31.72 | U$7.P2.6_GPIO/PWM 37.73,49.35 v39.41,47.67 | v66.34,35.09 64.5,35.09 63.27,36.33 50.74,36.33 v47.35,39.72
  Route2 0.254: v39.41,47.67 40.55,47.67 47.03,41.18 47.03,40.04 v47.35,39.72 | v66.72,31.72 66.72,33.71 66.79,33.78 66.79,34.64 v66.34,35.09
V_TORQ-X  (1 unrouted)
  Top 0.254: U2.VDD 51.42,30.68 51.38,30.72
  Top 0.508: 51.38,30.72 50.12,30.75 C8.2
  Top 1.016: R11.2 R4.2 50.12,16.7 50.12,30.75
V_TORQ-Y  (1 unrouted)
  Top 0.254: 40.94,30.72 C7.2 40.63,30.72 41.01,30.7 U1.VDD
  Top 0.762: 40.93,30.78 C7.2
  Top 1.016: 40.63,30.72 40.11,30.2 R5.2 R12.2
V_TORQ-Z  (1 unrouted)
  Top 0.254: C9.2 59.67,30.87 61.47,30.68 U3.VDD
  Top 1.016: R10.2 R9.2 59.67,23.15 59.67,30.87
VBAT
  Top 0.254: LDO_3V1.P$3 | 9.77,79.12 C13.2 | LDO_5V1.P$1 | U5.V_IN 11.22,65.06 11.47,64.81
  Top 0.508: LDO_3V1.P$1
  Top 0.61: LDO_3V1.P$3 8.42,77.77 8.42,75.86 LDO_3V1.P$1 11.09,75.86 11.73,75.23 15.54,75.23 17.05,73.72 17.54,73.72 | LDO_3V1.P$3 9.77,79.12 | LDO_5V1.P$1 81.32,78.15 81.32,76.24 | LDO_5V1.P$3 81.32,76.25 81.32,76.24 | LDO_5V1.P$1 79.74,78.38 C20.2 | 81.32,76.24 81.32,74.97 79.04,72.69 71.16,72.69 71.16,74.29 C6.2 | 13.15,64.3 12.61,64.3 | 12.61,64.3 11.98,64.3 11.47,64.81 | 8.11,52.31 R14.1 | 13.15,64.3 C4.1 12.61,64.3 | 13.15,64.3 14.61,64.3 | 14.61,64.3 15.11,64.3 | 15.11,64.3 16.02,64.3 16.27,64.56 16.27,64.08 17.54,62.81 | 14.61,64.3 14.61,63.86 C10.1 15.11,64.16 15.11,64.3
  Top 1.27: U$1.P$85 69.13,74.34 C6.2
  Top 1.524: U$1.P$85 65.96,76.25 65.96,76.09 65.59,73.72
  Top 3: 65.59,73.72 65.58,73.72 17.54,73.72 17.54,62.81 17.54,60.24 10.11,52.81 8.61,52.81 8.11,52.31
  pour Top (no thermals): 65.32,80.74 67.86,80.74 67.86,75.48 65.32,75.48
VBUCK
  pour Top (no thermals): 3.11,54.31 5.61,56.81 5.61,59.81 8.61,59.81 8.61,55.81 5.11,52.31 5.11,50.81 3.11,50.81
  pour Top (no thermals): 5.12,59.22 8.93,59.22 8.93,67.61 6.9,67.61 6.9,72.18 5.12,72.18
VBUCK/VBAT  (via drill 0.6)  (6 unrouted)
  Top 0.254: .C13.1 35.27,2.14 34.96,4.88 | 34.96,4.88 U$9.P$8 U$9.P$7 | U$9.P$5 33.41,5.68 33.41,4.88 34.96,4.88 | .C7.1 51.27,2.14 50.96,4.88 | 50.96,4.88 U$5.P$8 U$5.P$7 | U$5.P$5 49.41,5.68 49.41,4.88 50.96,4.88 | .C1.1 67.27,2.14 66.96,4.88 | 66.96,4.88 U$4.P$8 U$4.P$7 | U$4.P$5 65.41,5.68 65.41,4.88 66.96,4.88
  other vias: 6.11,43.31 7.11,43.31 8.11,43.31 5.11,43.31 4.11,43.31 4.11,42.31 4.11,41.31 5.11,41.31 5.11,42.31 6.11,42.31 7.11,42.31 8.11,42.31 8.11,41.31 7.11,41.31 6.11,41.31 34.61,4.31 33.61,4.31 33.61,3.31 33.61,2.31 32.61,2.31 32.61,3.31 50.61,4.31 49.61,4.31 49.61,3.31 49.61,2.31 48.61,2.31 48.61,3.31 66.61,4.31 65.61,4.31 65.61,3.31 65.61,2.31 64.61,2.31 64.61,3.31 58.61,7.81 58.61,6.81 58.61,5.81 57.61,6.81 57.61,5.81 74.61,7.81 74.61,6.81 74.61,5.81 73.61,5.81 73.61,6.81 42.11,7.81 42.11,6.81 42.11,5.81 41.11,5.81 41.11,6.81
  pour Route2: 3.61,43.81 9.11,43.81 9.11,27.81 24.61,12.31 74.61,12.31 77.11,9.81 77.11,0.31 18.61,0.31 3.61,15.31
  pour Top (no thermals): 3.61,46.31 9.11,46.31 9.11,40.81 3.61,40.81
VOUT-X  (1 unrouted)
  Top 0.254: U$5.P$3 49.96,9.43 51.48,10.5 .C9.1 | .C9.1 51.91,11.08 51.98,11.48 | .C9.1 51.61,10.68 52.62,10.68 52.64,10.18
  Top 0.61: U$5.P$1 51.61,8.48 .C9.1
  Top 1.016: R4.1 55.51,8.41 53.61,10.31 51.67,10.31 51.48,10.5
VOUT-Y  (1 unrouted)
  Top 0.254: U$9.P$3 33.96,9.43 .C15.1 | .C15.1 35.91,11.08 35.98,11.48 | 36.62,10.68 35.61,10.68 .C15.1
  Top 0.61: U$9.P$1 35.61,8.48 .C15.1
  Top 1.016: R5.1 39.01,8.41 37.11,10.31 35.88,10.31 .C15.1
VOUT-Z  (1 unrouted)
  Top 0.254: U$4.P$3 65.96,9.43 .C6.1 | .C6.1 67.91,11.08 67.98,11.48 | .C6.1 67.61,10.68 68.62,10.68 68.64,10.18
  Top 0.61: U$4.P$1 67.61,8.48 .C6.1
  Top 1.016: R9.1 71.51,8.41 69.61,10.31 67.98,10.31 67.61,10.68

## Text on the board
Reference: GND | VBAT | MT_Z_B | MT_Z_A
tDocu: B | A | DRV_Y | DRV_Z | DRV_X